# EAGLE board 20140912avoccado-avr-pcb-100x100panel (EAGLE 7.2.0), part 1 of 3
Avoccado-avr controller
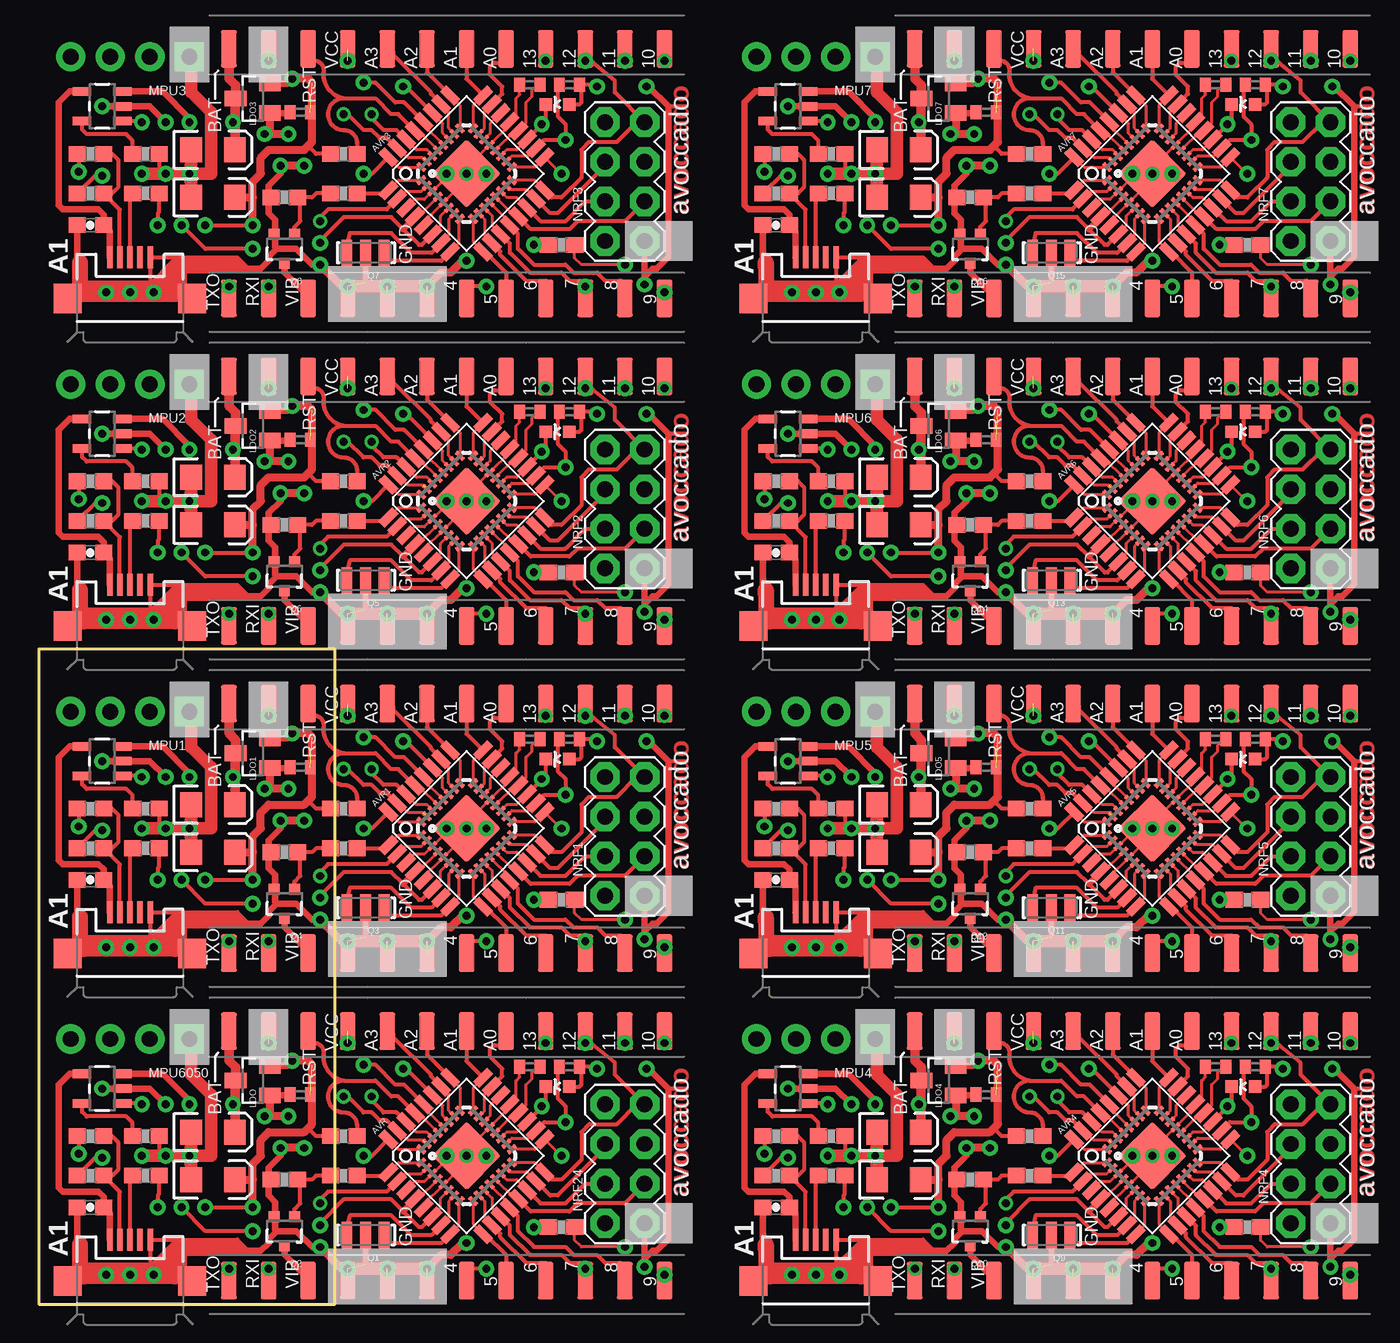
[diagram p0: board, top side]
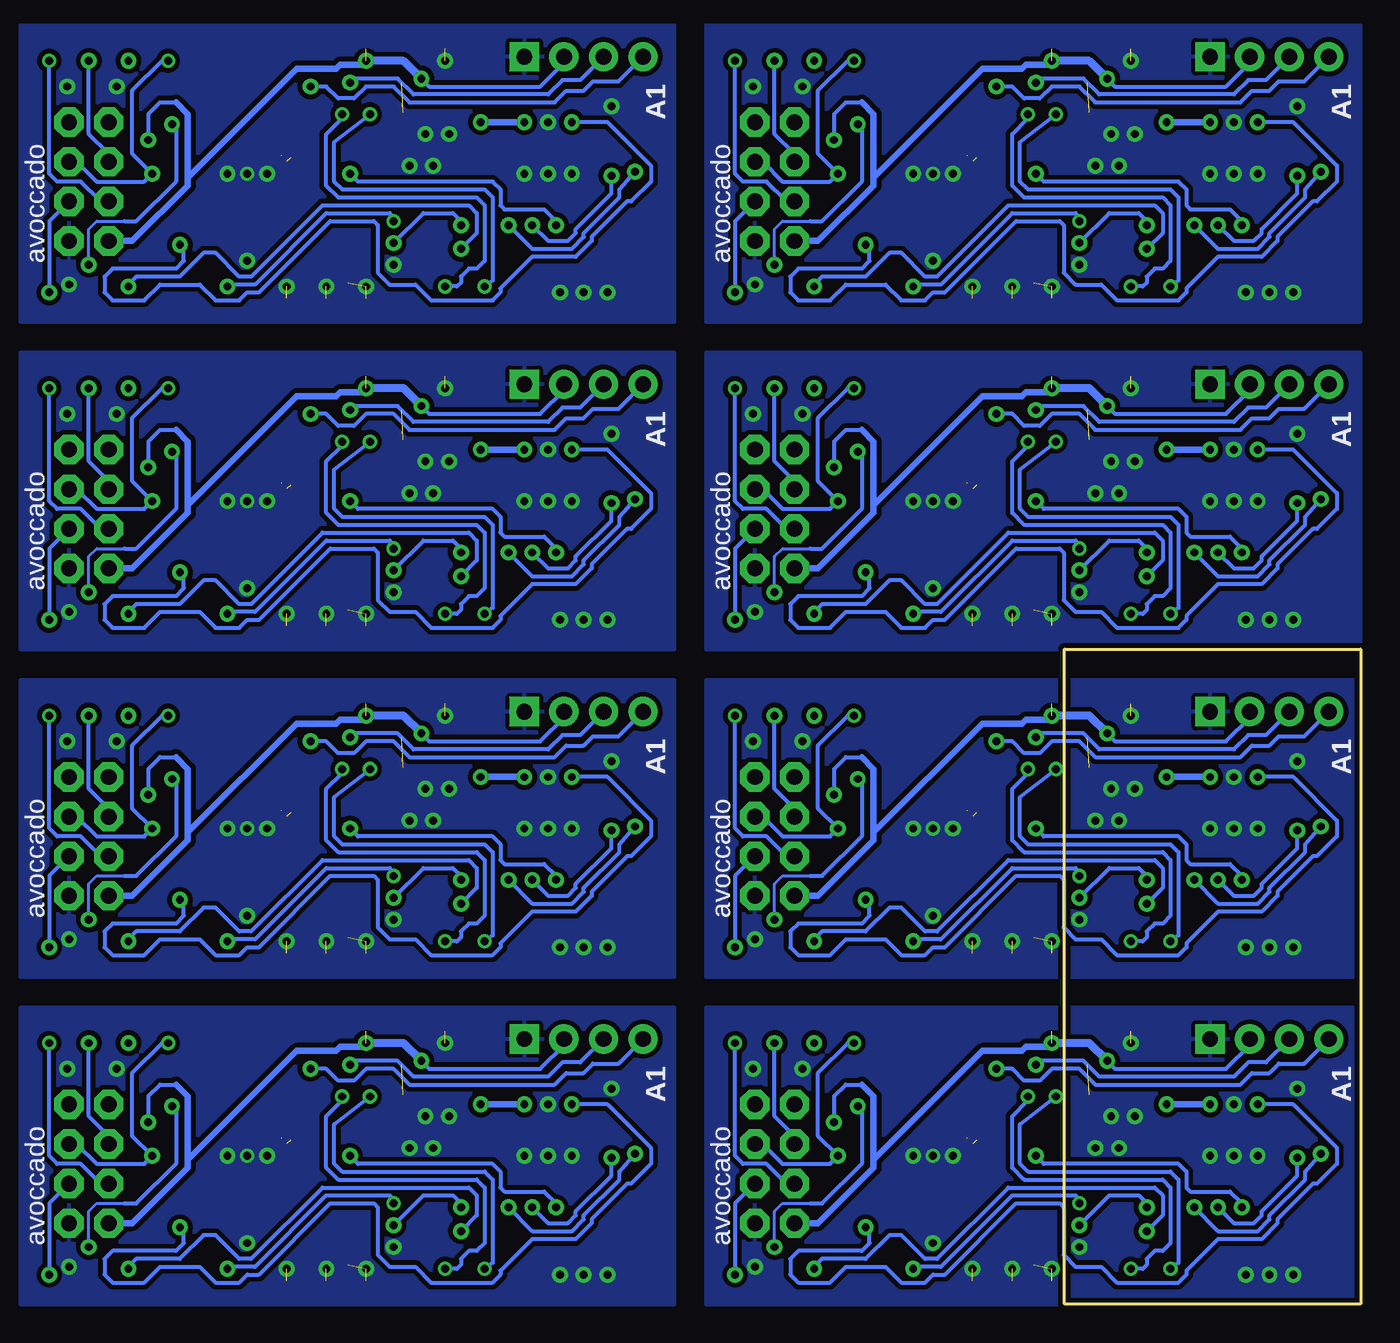
[diagram p1: board, bottom side, seen from below]

Size 19 x 42 mm. Coordinates in mm from the lower left corner, seen from the top.
Outline: 0,42 0,0 19,0 19,42 0,42
Copper layers (1*16): Top 0.035mm / dielectric 1.5mm / Bottom 0.035mm
Design rules "haka_35_l2": minimum track width 0.15mm, minimum drill 0.3mm, track to track 0.15mm, track to pad 0.15mm, pad to pad 0.15mm, via to via 0.15mm, smd to smd 0mil, copper to edge 0.2mm, drill to drill 0.2mm, minimum pad ring 0.2mm, minimum via ring 0.2mm, stop-mask expansion 0.1mm, vias tented up to drill 0mil, thermal gap 10mil
Net classes: 1 vcc: width 0.254 mm; 3 usbvcc: width 0.203 mm, drill 0.61 mm, clearance 0.152 mm

## Footprints (pad centres in the part's own frame; a part is rotated, then mirrored left to right if it is on the bottom)
TQFP32-08 = smd 1.27 x 0.559: 1 -4.293,2.8; 2 -4.293,2; 3 -4.293,1.2; 4 -4.293,0.4; 5 -4.293,-0.4; 6 -4.293,-1.2; 7 -4.293,-2; 8 -4.293,-2.8; 17 4.293,-2.8; 18 4.293,-2; 19 4.293,-1.2; 20 4.293,-0.4; 21 4.293,0.4; 22 4.293,1.2; 23 4.293,2; 24 4.293,2.8 | smd 0.559 x 1.27: 9 -2.8,-4.293; 10 -2,-4.293; 11 -1.2,-4.293; 12 -0.4,-4.293; 13 0.4,-4.293; 14 1.2,-4.293; 15 2,-4.293; 16 2.8,-4.293; 25 2.8,4.293; 26 2,4.293; 27 1.2,4.293; 28 0.4,4.293; 29 -0.4,4.293; 30 -1.2,4.293; 31 -2,4.293; 32 -2.8,4.293
C0402 = smd 0.7 x 0.9: 1 -0.65,0; 2 0.65,0
0603-CAP = smd 1.1 x 1: 1 -0.85,0; 2 0.85,0
EIA3216 = smd 1.4 x 1.6: A 1.4,0; C -1.4,0
LED-0603 = smd 0.8 x 0.8: A 0,-0.75; C 0,0.75
MLF32 = smd 0.7 x 0.3: 1 -2.35,1.75; 2 -2.35,1.25; 3 -2.35,0.75; 4 -2.35,0.25; 5 -2.35,-0.25; 6 -2.35,-0.75; 7 -2.35,-1.25; 8 -2.35,-1.75; 17 2.35,-1.75; 18 2.35,-1.25; 19 2.35,-0.75; 20 2.35,-0.25; 21 2.35,0.25; 22 2.35,0.75; 23 2.35,1.25; 24 2.35,1.75 | smd 0.3 x 0.7: 9 -1.75,-2.35; 10 -1.25,-2.35; 11 -0.75,-2.35; 12 -0.25,-2.35; 13 0.25,-2.35; 14 0.75,-2.35; 15 1.25,-2.35; 16 1.75,-2.35; 25 1.75,2.35; 26 1.25,2.35; 27 0.75,2.35; 28 0.25,2.35; 29 -0.25,2.35; 30 -0.75,2.35; 31 -1.25,2.35; 32 -1.75,2.35 | smd 3.1 x 3.1: PAD 0,0
1X04-SMD = smd 1 x 2.4: 1 -3.81,-0.254; 2 -1.27,-0.254; 3 1.27,-0.254; 4 3.81,-0.254
SOT23 = smd 1 x 1.4: 1 -0.95,-1.1; 2 0.95,-1.1; 3 0,1.1
1X04_NO_SILK = drill 1.016 pad 1.88 square: 1 0,0 | drill 1.016 pad 1.88: 2 2.54,0; 3 5.08,0; 4 7.62,0
2X4 = drill 1.016 pad 1.88 octagon: 1 -3.81,-1.27; 2 -3.81,1.27; 3 -1.27,-1.27; 4 -1.27,1.27; 5 1.27,-1.27; 6 1.27,1.27; 7 3.81,-1.27; 8 3.81,1.27
RESONATOR-SMD = smd 0.7 x 1.7: 1 -1.2,0; 2 0,0; 3 1.2,0
SOT323 = smd 0.7 x 0.7: 1 -0.65,-0.925; 2 0.65,-0.925; 3 0,0.925
0603-RES = smd 1.1 x 1: 1 -0.85,0; 2 0.85,0
SOT23-5 = smd 0.55 x 1.2: 1 -0.95,-1.3; 2 0,-1.3; 3 0.95,-1.3; 4 0.95,1.3; 5 -0.95,1.3
USB-MICROB = smd 0.35 x 1.4: D+ 0,2.65; D- -0.65,2.65; GND 1.3,2.65; ID 0.65,2.65; VBUS -1.3,2.65 | smd 1.8 x 1.9: MT1 -4,0; MT2 4,0

## Placement (x,y rotation side)
AVR  ATMEGA328P  [TQFP32-08]  27.43,9.5 45 top  (outside the outline)
AVR1  ATMEGA328P  [TQFP32-08]  27.43,30.5 45 top  (outside the outline)
AVR2  ATMEGA328P  [TQFP32-08]  27.43,51.5 45 top  (outside the outline)
AVR3  ATMEGA328P  [TQFP32-08]  27.43,72.5 45 top  (outside the outline)
AVR4  ATMEGA328P  [TQFP32-08]  71.43,9.5 45 top  (outside the outline)
AVR5  ATMEGA328P  [TQFP32-08]  71.43,30.5 45 top  (outside the outline)
AVR6  ATMEGA328P  [TQFP32-08]  71.43,51.5 45 top  (outside the outline)
AVR7  ATMEGA328P  [TQFP32-08]  71.43,72.5 45 top  (outside the outline)
C1  0.1uF  [C0402]  31.5,15.21 0 top  (outside the outline)
C2  0.1uF  [C0402]  16.76,34.44 180 top
C3  0.1uF  [C0402]  34.04,15.21 180 top  (outside the outline)
C4  4.7uF  [0603-CAP]  3.3,6.2 180 top
C5  10uF  [EIA3216]  11.18,28.98 0 top
C6  0.1uF  [C0402]  34.04,36.22 180 top  (outside the outline)
C7  0.1uF  [C0402]  31.5,36.22 0 top  (outside the outline)
C8  10uF  [EIA3216]  11.18,32.02 0 top
C9  4.7uF  [0603-CAP]  3.3,27.2 180 top
C10  0.1uF  [C0402]  16.76,13.44 180 top
C11  0.1uF  [C0402]  16.76,55.44 180 top  (outside the outline)
C12  10uF  [EIA3216]  11.18,49.98 0 top  (outside the outline)
C13  10uF  [EIA3216]  11.18,7.98 0 top
C14  0.1uF  [C0402]  34.04,57.22 180 top  (outside the outline)
C15  0.1uF  [C0402]  31.5,57.22 0 top  (outside the outline)
C16  10uF  [EIA3216]  11.18,53.02 0 top  (outside the outline)
C17  4.7uF  [0603-CAP]  3.3,48.2 180 top  (outside the outline)
C18  0.1uF  [C0402]  16.76,76.44 180 top  (outside the outline)
C19  10uF  [EIA3216]  11.18,11.02 0 top
C20  10uF  [EIA3216]  11.18,70.98 0 top  (outside the outline)
C21  0.1uF  [C0402]  34.04,78.22 180 top  (outside the outline)
C22  0.1uF  [C0402]  31.5,78.22 0 top  (outside the outline)
C23  10uF  [EIA3216]  11.18,74.02 0 top  (outside the outline)
C24  4.7uF  [0603-CAP]  3.3,69.2 180 top  (outside the outline)
C25  0.1uF  [C0402]  60.76,13.44 180 top  (outside the outline)
C26  10uF  [EIA3216]  55.18,7.98 0 top  (outside the outline)
C27  0.1uF  [C0402]  78.04,15.21 180 top  (outside the outline)
C28  0.1uF  [C0402]  75.5,15.21 0 top  (outside the outline)
C29  10uF  [EIA3216]  55.18,11.02 0 top  (outside the outline)
C30  4.7uF  [0603-CAP]  47.3,6.2 180 top  (outside the outline)
C31  0.1uF  [C0402]  60.76,34.44 180 top  (outside the outline)
C32  10uF  [EIA3216]  55.18,28.98 0 top  (outside the outline)
C33  0.1uF  [C0402]  78.04,36.22 180 top  (outside the outline)
C34  0.1uF  [C0402]  75.5,36.22 0 top  (outside the outline)
C35  10uF  [EIA3216]  55.18,32.02 0 top  (outside the outline)
C36  4.7uF  [0603-CAP]  47.3,27.2 180 top  (outside the outline)
C37  0.1uF  [C0402]  60.76,55.44 180 top  (outside the outline)
C38  10uF  [EIA3216]  55.18,49.98 0 top  (outside the outline)
C39  0.1uF  [C0402]  78.04,57.22 180 top  (outside the outline)
C40  0.1uF  [C0402]  75.5,57.22 0 top  (outside the outline)
C41  10uF  [EIA3216]  55.18,53.02 0 top  (outside the outline)
C42  4.7uF  [0603-CAP]  47.3,48.2 180 top  (outside the outline)
C43  0.1uF  [C0402]  60.76,76.44 180 top  (outside the outline)
C44  10uF  [EIA3216]  55.18,70.98 0 top  (outside the outline)
C45  0.1uF  [C0402]  78.04,78.22 180 top  (outside the outline)
C46  0.1uF  [C0402]  75.5,78.22 0 top  (outside the outline)
C47  10uF  [EIA3216]  55.18,74.02 0 top  (outside the outline)
C48  4.7uF  [0603-CAP]  47.3,69.2 180 top  (outside the outline)
D1  LED  [LED-0603]  33.27,13.95 90 top  (outside the outline)
D2  LED  [LED-0603]  33.27,34.95 90 top  (outside the outline)
D3  LED  [LED-0603]  33.27,55.95 90 top  (outside the outline)
D4  LED  [LED-0603]  33.27,76.94 90 top  (outside the outline)
D5  LED  [LED-0603]  77.27,13.95 90 top  (outside the outline)
D6  LED  [LED-0603]  77.27,34.95 90 top  (outside the outline)
D7  LED  [LED-0603]  77.27,55.95 90 top  (outside the outline)
D8  LED  [LED-0603]  77.27,76.94 90 top  (outside the outline)
IC1  ATMEGA328P-20MU  [MLF32]  27.43,30.5 45 top  (outside the outline)
IC2  ATMEGA328P-20MU  [MLF32]  27.43,51.5 45 top  (outside the outline)
IC3  ATMEGA328P-20MU  [MLF32]  27.43,72.5 45 top  (outside the outline)
IC4  ATMEGA328P-20MU  [MLF32]  71.43,9.5 45 top  (outside the outline)
IC5  ATMEGA328P-20MU  [MLF32]  27.43,9.5 45 top  (outside the outline)
IC6  ATMEGA328P-20MU  [MLF32]  71.43,30.5 45 top  (outside the outline)
IC7  ATMEGA328P-20MU  [MLF32]  71.43,51.5 45 top  (outside the outline)
IC8  ATMEGA328P-20MU  [MLF32]  71.43,72.5 45 top  (outside the outline)
JP1  [1X04-SMD]  16,38.76 0 top
JP2  [1X04-SMD]  26.16,38.76 0 top  (outside the outline)
JP3  [1X04-SMD]  16,17.75 0 top
JP4  [1X04-SMD]  36.32,38.76 0 top  (outside the outline)
JP5  [1X04-SMD]  26.16,17.75 0 top  (outside the outline)
JP6  [1X04-SMD]  36.32,22.25 180 top  (outside the outline)
JP7  [1X04-SMD]  26.16,22.25 180 top  (outside the outline)
JP8  [1X04-SMD]  36.32,17.75 0 top  (outside the outline)
JP9  [1X04-SMD]  36.32,1.25 180 top  (outside the outline)
JP10  [1X04-SMD]  26.16,1.25 180 top  (outside the outline)
JP11  [1X04-SMD]  16,1.25 180 top
JP12  [1X04-SMD]  16,22.25 180 top
JP13  [1X04-SMD]  16,59.76 0 top  (outside the outline)
JP14  [1X04-SMD]  26.16,59.76 0 top  (outside the outline)
JP15  [1X04-SMD]  36.32,59.76 0 top  (outside the outline)
JP16  [1X04-SMD]  36.32,43.24 180 top  (outside the outline)
JP17  [1X04-SMD]  26.16,43.24 180 top  (outside the outline)
JP18  [1X04-SMD]  16,43.24 180 top
JP19  [1X04-SMD]  16,80.75 0 top  (outside the outline)
JP20  [1X04-SMD]  26.16,80.75 0 top  (outside the outline)
JP21  [1X04-SMD]  36.32,80.75 0 top  (outside the outline)
JP22  [1X04-SMD]  36.32,64.25 180 top  (outside the outline)
JP23  [1X04-SMD]  26.16,64.25 180 top  (outside the outline)
JP24  [1X04-SMD]  16,64.25 180 top  (outside the outline)
JP25  [1X04-SMD]  60,17.75 0 top  (outside the outline)
JP26  [1X04-SMD]  70.16,17.75 0 top  (outside the outline)
JP27  [1X04-SMD]  80.32,17.75 0 top  (outside the outline)
JP28  [1X04-SMD]  80.32,1.25 180 top  (outside the outline)
JP29  [1X04-SMD]  70.16,1.25 180 top  (outside the outline)
JP30  [1X04-SMD]  60,1.25 180 top  (outside the outline)
JP31  [1X04-SMD]  60,38.76 0 top  (outside the outline)
JP32  [1X04-SMD]  70.16,38.76 0 top  (outside the outline)
JP33  [1X04-SMD]  80.32,38.76 0 top  (outside the outline)
JP34  [1X04-SMD]  80.32,22.25 180 top  (outside the outline)
JP35  [1X04-SMD]  70.16,22.25 180 top  (outside the outline)
JP36  [1X04-SMD]  60,22.25 180 top  (outside the outline)
JP37  [1X04-SMD]  60,59.76 0 top  (outside the outline)
JP38  [1X04-SMD]  70.16,59.76 0 top  (outside the outline)
JP39  [1X04-SMD]  80.32,59.76 0 top  (outside the outline)
JP40  [1X04-SMD]  80.32,43.24 180 top  (outside the outline)
JP41  [1X04-SMD]  70.16,43.24 180 top  (outside the outline)
JP42  [1X04-SMD]  60,43.24 180 top  (outside the outline)
JP43  [1X04-SMD]  60,80.75 0 top  (outside the outline)
JP44  [1X04-SMD]  70.16,80.75 0 top  (outside the outline)
JP45  [1X04-SMD]  80.32,80.75 0 top  (outside the outline)
JP46  [1X04-SMD]  80.32,64.25 180 top  (outside the outline)
JP47  [1X04-SMD]  70.16,64.25 180 top  (outside the outline)
JP48  [1X04-SMD]  60,64.25 180 top  (outside the outline)
LDO  MCP1703CB  [SOT23]  13.72,14.33 90 top
LDO1  MCP1703CB  [SOT23]  13.72,35.33 90 top
LDO2  MCP1703CB  [SOT23]  13.72,56.33 90 top  (outside the outline)
LDO3  MCP1703CB  [SOT23]  13.72,77.33 90 top  (outside the outline)
LDO4  MCP1703CB  [SOT23]  57.72,14.33 90 top  (outside the outline)
LDO5  MCP1703CB  [SOT23]  57.72,35.33 90 top  (outside the outline)
LDO6  MCP1703CB  [SOT23]  57.72,56.33 90 top  (outside the outline)
LDO7  MCP1703CB  [SOT23]  57.72,77.33 90 top  (outside the outline)
MPU1  [1X04_NO_SILK]  9.65,37.99 180 top
MPU2  [1X04_NO_SILK]  9.65,58.99 180 top  (outside the outline)
MPU3  [1X04_NO_SILK]  9.65,79.99 180 top  (outside the outline)
MPU4  [1X04_NO_SILK]  53.65,16.99 180 top  (outside the outline)
MPU5  [1X04_NO_SILK]  53.65,37.99 180 top  (outside the outline)
MPU6  [1X04_NO_SILK]  53.65,58.99 180 top  (outside the outline)
MPU7  [1X04_NO_SILK]  53.65,79.99 180 top  (outside the outline)
MPU6050  [1X04_NO_SILK]  9.65,16.99 180 top
NRF1  M04X2  [2X4]  37.59,29.99 90 top  (outside the outline)
NRF2  M04X2  [2X4]  37.59,50.99 90 top  (outside the outline)
NRF3  M04X2  [2X4]  37.59,71.99 90 top  (outside the outline)
NRF4  M04X2  [2X4]  81.59,8.99 90 top  (outside the outline)
NRF5  M04X2  [2X4]  81.59,29.99 90 top  (outside the outline)
NRF6  M04X2  [2X4]  81.59,50.99 90 top  (outside the outline)
NRF7  M04X2  [2X4]  81.59,71.99 90 top  (outside the outline)
NRF24  M04X2  [2X4]  37.59,8.99 90 top  (outside the outline)
Q1  16MHz  [RESONATOR-SMD]  20.95,4.42 180 top
Q2  FET  [SOT323]  15.75,4.67 180 top
Q3  16MHz  [RESONATOR-SMD]  20.95,25.42 180 top
Q4  FET  [SOT323]  15.75,25.67 180 top
Q5  16MHz  [RESONATOR-SMD]  20.95,46.42 180 top  (outside the outline)
Q6  FET  [SOT323]  15.75,46.67 180 top  (outside the outline)
Q7  16MHz  [RESONATOR-SMD]  20.95,67.42 180 top  (outside the outline)
Q8  FET  [SOT323]  15.75,67.67 180 top  (outside the outline)
Q9  16MHz  [RESONATOR-SMD]  64.95,4.42 180 top  (outside the outline)
Q10  FET  [SOT323]  59.75,4.67 180 top  (outside the outline)
Q11  16MHz  [RESONATOR-SMD]  64.95,25.42 180 top  (outside the outline)
Q12  FET  [SOT323]  59.75,25.67 180 top  (outside the outline)
Q13  16MHz  [RESONATOR-SMD]  64.95,46.42 180 top  (outside the outline)
Q14  FET  [SOT323]  59.75,46.67 180 top  (outside the outline)
Q15  16MHz  [RESONATOR-SMD]  64.95,67.42 180 top  (outside the outline)
Q16  FET  [SOT323]  59.75,67.67 180 top  (outside the outline)
R1  1K  [0603-RES]  19.56,8.23 180 top
R2  10K  [0603-RES]  19.56,10.77 180 top
R3  2K  [0603-RES]  6.86,10.77 180 top
R4  2K  [0603-RES]  33.53,4.93 180 top  (outside the outline)
R5  1M  [0603-RES]  15.75,7.98 0 top
R6  68  [0603-RES]  3.3,8.23 180 top
R7  68  [0603-RES]  6.86,8.23 0 top
R8  2K  [0603-RES]  3.3,10.77 180 top
R9  10K  [0603-RES]  19.56,31.77 180 top
R10  1K  [0603-RES]  19.56,29.23 180 top
R11  2K  [0603-RES]  6.86,31.77 180 top
R12  2K  [0603-RES]  33.53,25.93 180 top  (outside the outline)
R13  1M  [0603-RES]  15.75,28.98 0 top
R14  68  [0603-RES]  3.3,29.23 180 top
R15  68  [0603-RES]  6.86,29.23 0 top
R16  2K  [0603-RES]  3.3,31.77 180 top
R17  10K  [0603-RES]  19.56,52.77 180 top  (outside the outline)
R18  1K  [0603-RES]  19.56,50.23 180 top  (outside the outline)
R19  2K  [0603-RES]  6.86,52.77 180 top  (outside the outline)
R20  2K  [0603-RES]  33.53,46.93 180 top  (outside the outline)
R21  1M  [0603-RES]  15.75,49.98 0 top  (outside the outline)
R22  68  [0603-RES]  3.3,50.23 180 top  (outside the outline)
R23  68  [0603-RES]  6.86,50.23 0 top  (outside the outline)
R24  2K  [0603-RES]  3.3,52.77 180 top  (outside the outline)
R25  10K  [0603-RES]  19.56,73.77 180 top  (outside the outline)
R26  1K  [0603-RES]  19.56,71.23 180 top  (outside the outline)
R27  2K  [0603-RES]  6.86,73.77 180 top  (outside the outline)
R28  2K  [0603-RES]  33.53,67.93 180 top  (outside the outline)
R29  1M  [0603-RES]  15.75,70.98 0 top  (outside the outline)
R30  68  [0603-RES]  3.3,71.23 180 top  (outside the outline)
R31  68  [0603-RES]  6.86,71.23 0 top  (outside the outline)
R32  2K  [0603-RES]  3.3,73.77 180 top  (outside the outline)
R33  10K  [0603-RES]  63.56,10.77 180 top  (outside the outline)
R34  1K  [0603-RES]  63.56,8.23 180 top  (outside the outline)
R35  2K  [0603-RES]  50.86,10.77 180 top  (outside the outline)
R36  2K  [0603-RES]  77.53,4.93 180 top  (outside the outline)
R37  1M  [0603-RES]  59.75,7.98 0 top  (outside the outline)
R38  68  [0603-RES]  47.3,8.23 180 top  (outside the outline)
R39  68  [0603-RES]  50.86,8.23 0 top  (outside the outline)
R40  2K  [0603-RES]  47.3,10.77 180 top  (outside the outline)
R41  10K  [0603-RES]  63.56,31.77 180 top  (outside the outline)
R42  1K  [0603-RES]  63.56,29.23 180 top  (outside the outline)
R43  2K  [0603-RES]  50.86,31.77 180 top  (outside the outline)
R44  2K  [0603-RES]  77.53,25.93 180 top  (outside the outline)
R45  1M  [0603-RES]  59.75,28.98 0 top  (outside the outline)
R46  68  [0603-RES]  47.3,29.23 180 top  (outside the outline)
R47  68  [0603-RES]  50.86,29.23 0 top  (outside the outline)
R48  2K  [0603-RES]  47.3,31.77 180 top  (outside the outline)
R49  10K  [0603-RES]  63.56,52.77 180 top  (outside the outline)
R50  1K  [0603-RES]  63.56,50.23 180 top  (outside the outline)
R51  2K  [0603-RES]  50.86,52.77 180 top  (outside the outline)
R52  2K  [0603-RES]  77.53,46.93 180 top  (outside the outline)
R53  1M  [0603-RES]  59.75,49.98 0 top  (outside the outline)
R54  68  [0603-RES]  47.3,50.23 180 top  (outside the outline)
R55  68  [0603-RES]  50.86,50.23 0 top  (outside the outline)
R56  2K  [0603-RES]  47.3,52.77 180 top  (outside the outline)
R57  10K  [0603-RES]  63.56,73.77 180 top  (outside the outline)
R58  1K  [0603-RES]  63.56,71.23 180 top  (outside the outline)
R59  2K  [0603-RES]  50.86,73.77 180 top  (outside the outline)
R60  2K  [0603-RES]  77.53,67.93 180 top  (outside the outline)
R61  1M  [0603-RES]  59.75,70.98 0 top  (outside the outline)
R62  68  [0603-RES]  47.3,71.23 180 top  (outside the outline)
R63  68  [0603-RES]  50.86,71.23 0 top  (outside the outline)
R64  2K  [0603-RES]  47.3,73.77 180 top  (outside the outline)
U1  MCP73831  [SOT23-5]  4.06,34.82 90 top
U2  MCP73831  [SOT23-5]  4.06,13.82 90 top
U3  MCP73831  [SOT23-5]  4.06,55.82 90 top  (outside the outline)
U4  MCP73831  [SOT23-5]  4.06,76.82 90 top  (outside the outline)
U5  MCP73831  [SOT23-5]  48.06,13.82 90 top  (outside the outline)
U6  MCP73831  [SOT23-5]  48.06,34.82 90 top  (outside the outline)
U7  MCP73831  [SOT23-5]  48.06,55.82 90 top  (outside the outline)
U8  MCP73831  [SOT23-5]  48.06,76.82 90 top  (outside the outline)
X1  Micro USB  [USB-MICROB]  5.84,1.48 0 top
X2  Micro USB  [USB-MICROB]  5.84,22.48 0 top
X3  Micro USB  [USB-MICROB]  5.84,43.48 0 top
X4  Micro USB  [USB-MICROB]  5.84,64.48 0 top  (outside the outline)
X5  Micro USB  [USB-MICROB]  49.84,1.48 0 top  (outside the outline)
X6  Micro USB  [USB-MICROB]  49.84,22.48 0 top  (outside the outline)
X7  Micro USB  [USB-MICROB]  49.84,43.48 0 top  (outside the outline)
X8  Micro USB  [USB-MICROB]  49.84,64.48 0 top  (outside the outline)

## Library data of the parts
AVR AVR1-AVR7 = SparkFun-DigitalIC; PROD_ID: IC-09069
C1-C3 C5-C8 C10-C16 C18-C23 C25-C29 C31-C35 C37-C41 C43-C47 D1-D8 Q1 Q3 Q5 Q7 Q9 Q11 Q13 Q15 U1-U8 X1-X8 = SparkFun
C4 C9 C17 C24 C30 C36 C42 C48 = SparkFun-Capacitors; PROD_ID: CAP-08280
IC1-IC8 = idii
JP1-JP48 = smd-pads
LDO LDO1-LDO7 = linear
MPU1-MPU7 MPU6050 NRF1-NRF7 NRF24 = SparkFun-Connectors
Q2 Q4 Q6 Q8 Q10 Q12 Q14 Q16 = SparkFun-DiscreteSemi; PROD_ID: TRANS-11151
R1-R64 = SparkFun-Resistors

## Nets
3V1: AVR1.4 AVR1.6 AVR1.18 C2.1 C5.A C6.2 IC1.4 IC1.6 IC1.18 JP1.4 LDO1.2 MPU1.2 NRF1.2 R9.2 R16.2
3V2: AVR2.4 AVR2.6 AVR2.18 C11.1 C12.A C14.2 IC2.4 IC2.6 IC2.18 JP13.4 LDO2.2 MPU2.2 NRF2.2 R17.2 R24.2
3V3: AVR.4 AVR.6 AVR.18 C3.2 C10.1 C13.A IC5.4 IC5.6 IC5.18 JP3.4 LDO.2 MPU6050.2 NRF24.2 R2.2 R8.2
3V4: AVR3.4 AVR3.6 AVR3.18 C18.1 C20.A C21.2 IC3.4 IC3.6 IC3.18 JP19.4 LDO3.2 MPU3.2 NRF3.2 R25.2 R32.2
3V5: AVR4.4 AVR4.6 AVR4.18 C25.1 C26.A C27.2 IC4.4 IC4.6 IC4.18 JP25.4 LDO4.2 MPU4.2 NRF4.2 R33.2 R40.2
3V6: AVR5.4 AVR5.6 AVR5.18 C31.1 C32.A C33.2 IC6.4 IC6.6 IC6.18 JP31.4 LDO5.2 MPU5.2 NRF5.2 R41.2 R48.2
3V7: AVR6.4 AVR6.6 AVR6.18 C37.1 C38.A C39.2 IC7.4 IC7.6 IC7.18 JP37.4 LDO6.2 MPU6.2 NRF6.2 R49.2 R56.2
3V8: AVR7.4 AVR7.6 AVR7.18 C43.1 C44.A C45.2 IC8.4 IC8.6 IC8.18 JP43.4 LDO7.2 MPU7.2 NRF7.2 R57.2 R64.2
A0: AVR.23 IC5.23 JP5.4
A1: AVR.24 IC5.24 JP5.3
A2: AVR.25 IC5.25 JP5.2
A3: AVR.26 IC5.26 JP5.1
A4: AVR.27 IC5.27 MPU6050.4
A5: AVR.28 IC5.28 MPU6050.3
A6: AVR.19 D1.C IC5.19 R4.1
A7: AVR.22 IC5.22
A8: AVR1.28 IC1.28 MPU1.3
A9: AVR1.27 IC1.27 MPU1.4
A10: AVR1.26 IC1.26 JP2.1
A11: AVR1.25 IC1.25 JP2.2
A12: AVR1.24 IC1.24 JP2.3
A13: AVR1.23 IC1.23 JP2.4
A14: AVR1.19 D2.C IC1.19 R12.1
A15: AVR1.22 IC1.22
A16: AVR2.28 IC2.28 MPU2.3
A17: AVR2.27 IC2.27 MPU2.4
A18: AVR2.26 IC2.26 JP14.1
A19: AVR2.25 IC2.25 JP14.2
A20: AVR2.24 IC2.24 JP14.3
A21: AVR2.23 IC2.23 JP14.4
A22: AVR2.19 D3.C IC2.19 R20.1
A23: AVR2.22 IC2.22
A24: AVR3.28 IC3.28 MPU3.3
A25: AVR3.27 IC3.27 MPU3.4
A26: AVR3.26 IC3.26 JP20.1
A27: AVR3.25 IC3.25 JP20.2
A28: AVR3.24 IC3.24 JP20.3
A29: AVR3.23 IC3.23 JP20.4
A30: AVR3.19 D4.C IC3.19 R28.1
A31: AVR3.22 IC3.22
A32: AVR4.28 IC4.28 MPU4.3
A33: AVR4.27 IC4.27 MPU4.4
A34: AVR4.26 IC4.26 JP26.1
A35: AVR4.25 IC4.25 JP26.2
A36: AVR4.24 IC4.24 JP26.3
A37: AVR4.23 IC4.23 JP26.4
A38: AVR4.19 D5.C IC4.19 R36.1
A39: AVR4.22 IC4.22
A40: AVR5.28 IC6.28 MPU5.3
A41: AVR5.27 IC6.27 MPU5.4
A42: AVR5.26 IC6.26 JP32.1
A43: AVR5.25 IC6.25 JP32.2
A44: AVR5.24 IC6.24 JP32.3
A45: AVR5.23 IC6.23 JP32.4
A46: AVR5.19 D6.C IC6.19 R44.1
A47: AVR5.22 IC6.22
A48: AVR6.28 IC7.28 MPU6.3
A49: AVR6.27 IC7.27 MPU6.4
A50: AVR6.26 IC7.26 JP38.1
A51: AVR6.25 IC7.25 JP38.2
A52: AVR6.24 IC7.24 JP38.3
A53: AVR6.23 IC7.23 JP38.4
A54: AVR6.19 D7.C IC7.19 R52.1
A55: AVR6.22 IC7.22
A56: AVR7.28 IC8.28 MPU7.3
A57: AVR7.27 IC8.27 MPU7.4
A58: AVR7.26 IC8.26 JP44.1
A59: AVR7.25 IC8.25 JP44.2
A60: AVR7.24 IC8.24 JP44.3
A61: AVR7.23 IC8.23 JP44.4
A62: AVR7.19 D8.C IC8.19 R60.1
A63: AVR7.22 IC8.22
AREF: AVR.20 C1.2 IC5.20
AREF1: AVR1.20 C7.2 IC1.20
AREF2: AVR2.20 C15.2 IC2.20
AREF3: AVR3.20 C22.2 IC3.20
AREF4: AVR4.20 C28.2 IC4.20
AREF5: AVR5.20 C34.2 IC6.20
AREF6: AVR6.20 C40.2 IC7.20
AREF7: AVR7.20 C46.2 IC8.20
BUS: C4.1 U2.4 X1.VBUS
BUS1: C9.1 U1.4 X2.VBUS
BUS2: C17.1 U3.4 X3.VBUS
BUS3: C24.1 U4.4 X4.VBUS
BUS4: C30.1 U5.4 X5.VBUS
BUS5: C36.1 U6.4 X6.VBUS
BUS6: C42.1 U7.4 X7.VBUS
BUS7: C48.1 U8.4 X8.VBUS
D1: AVR1.13 IC1.13 JP6.1 NRF1.3
D2: AVR.32 IC5.32 R7.2
D3: AVR.1 IC5.1 R1.1
D4: AVR.2 IC5.2 JP10.2
D5: AVR.9 IC5.9 JP10.1
D6: AVR.10 IC5.10 JP9.4
D7: AVR.11 IC5.11 JP9.3 R6.2
D8: AVR.12 IC5.12 JP9.2
D9: AVR.13 IC5.13 JP9.1 NRF24.3
D10: AVR.14 IC5.14 JP8.4 NRF24.4
D11: AVR1.12 IC1.12 JP6.2
D12: AVR1.32 IC1.32 R15.2
D13: AVR1.1 IC1.1 R10.1
D14: AVR1.2 IC1.2 JP7.2
D15: AVR1.9 IC1.9 JP7.1
D16: AVR1.10 IC1.10 JP6.4
D17: AVR1.11 IC1.11 JP6.3 R14.2
D18: AVR1.14 IC1.14 JP4.4 NRF1.4
D19: AVR2.13 IC2.13 JP16.1 NRF2.3
D20: AVR2.12 IC2.12 JP16.2
D21: AVR2.32 IC2.32 R23.2
D22: AVR2.1 IC2.1 R18.1
D23: AVR2.2 IC2.2 JP17.2
D24: AVR2.9 IC2.9 JP17.1
D25: AVR2.10 IC2.10 JP16.4
D26: AVR2.11 IC2.11 JP16.3 R22.2
D27: AVR2.14 IC2.14 JP15.4 NRF2.4
D28: AVR3.13 IC3.13 JP22.1 NRF3.3
D29: AVR3.12 IC3.12 JP22.2
D30: AVR3.32 IC3.32 R31.2
D31: AVR3.1 IC3.1 R26.1
D32: AVR3.2 IC3.2 JP23.2
D33: AVR3.9 IC3.9 JP23.1
D34: AVR3.10 IC3.10 JP22.4
D35: AVR3.11 IC3.11 JP22.3 R30.2
D36: AVR3.14 IC3.14 JP21.4 NRF3.4
D37: AVR4.13 IC4.13 JP28.1 NRF4.3
D38: AVR4.12 IC4.12 JP28.2
D39: AVR4.32 IC4.32 R39.2
D40: AVR4.1 IC4.1 R34.1
D41: AVR4.2 IC4.2 JP29.2
D42: AVR4.9 IC4.9 JP29.1
D43: AVR4.10 IC4.10 JP28.4
D44: AVR4.11 IC4.11 JP28.3 R38.2
D45: AVR4.14 IC4.14 JP27.4 NRF4.4
D46: AVR5.13 IC6.13 JP34.1 NRF5.3
D47: AVR5.12 IC6.12 JP34.2
D48: AVR5.32 IC6.32 R47.2
D49: AVR5.1 IC6.1 R42.1
D50: AVR5.2 IC6.2 JP35.2
D51: AVR5.9 IC6.9 JP35.1
D52: AVR5.10 IC6.10 JP34.4
D53: AVR5.11 IC6.11 JP34.3 R46.2
D54: AVR5.14 IC6.14 JP33.4 NRF5.4
D55: AVR6.13 IC7.13 JP40.1 NRF6.3
D56: AVR6.12 IC7.12 JP40.2
D57: AVR6.32 IC7.32 R55.2
D58: AVR6.1 IC7.1 R50.1
D59: AVR6.2 IC7.2 JP41.2
D60: AVR6.9 IC7.9 JP41.1
D61: AVR6.10 IC7.10 JP40.4
D62: AVR6.11 IC7.11 JP40.3 R54.2
D63: AVR6.14 IC7.14 JP39.4 NRF6.4
D64: AVR7.13 IC8.13 JP46.1 NRF7.3
D65: AVR7.12 IC8.12 JP46.2
D66: AVR7.32 IC8.32 R63.2
D67: AVR7.1 IC8.1 R58.1
D68: AVR7.2 IC8.2 JP47.2
D69: AVR7.9 IC8.9 JP47.1
D70: AVR7.10 IC8.10 JP46.4
D71: AVR7.11 IC8.11 JP46.3 R62.2
D72: AVR7.14 IC8.14 JP45.4 NRF7.4
GND [vcc]: AVR.3 AVR.5 AVR.21 C1.1 C3.1 C4.2 C10.2 C13.C C19.C D1.A IC5.3 IC5.5 IC5.21 JP3.2 JP10.3 JP10.4 JP11.1 LDO.1 MPU6050.1 NRF24.1 Q1.2 Q2.2 R3.1 R5.1 U2.2 X1.GND
GND1 [vcc]: AVR1.3 AVR1.5 AVR1.21 C2.2 C5.C C6.1 C7.1 C8.C C9.2 D2.A IC1.3 IC1.5 IC1.21 JP1.2 JP7.3 JP7.4 JP12.1 LDO1.1 MPU1.1 NRF1.1 Q3.2 Q4.2 R11.1 R13.1 U1.2 X2.GND
GND2 [vcc]: AVR2.3 AVR2.5 AVR2.21 C11.2 C12.C C14.1 C15.1 C16.C C17.2 D3.A IC2.3 IC2.5 IC2.21 JP13.2 JP17.3 JP17.4 JP18.1 LDO2.1 MPU2.1 NRF2.1 Q5.2 Q6.2 R19.1 R21.1 U3.2 X3.GND
GND3 [vcc]: AVR3.3 AVR3.5 AVR3.21 C18.2 C20.C C21.1 C22.1 C23.C C24.2 D4.A IC3.3 IC3.5 IC3.21 JP19.2 JP23.3 JP23.4 JP24.1 LDO3.1 MPU3.1 NRF3.1 Q7.2 Q8.2 R27.1 R29.1 U4.2 X4.GND
GND4 [vcc]: AVR4.3 AVR4.5 AVR4.21 C25.2 C26.C C27.1 C28.1 C29.C C30.2 D5.A IC4.3 IC4.5 IC4.21 JP25.2 JP29.3 JP29.4 JP30.1 LDO4.1 MPU4.1 NRF4.1 Q9.2 Q10.2 R35.1 R37.1 U5.2 X5.GND
GND5 [vcc]: AVR5.3 AVR5.5 AVR5.21 C31.2 C32.C C33.1 C34.1 C35.C C36.2 D6.A IC6.3 IC6.5 IC6.21 JP31.2 JP35.3 JP35.4 JP36.1 LDO5.1 MPU5.1 NRF5.1 Q11.2 Q12.2 R43.1 R45.1 U6.2 X6.GND
GND6 [vcc]: AVR6.3 AVR6.5 AVR6.21 C37.2 C38.C C39.1 C40.1 C41.C C42.2 D7.A IC7.3 IC7.5 IC7.21 JP37.2 JP41.3 JP41.4 JP42.1 LDO6.1 MPU6.1 NRF6.1 Q13.2 Q14.2 R51.1 R53.1 U7.2 X7.GND
GND7 [vcc]: AVR7.3 AVR7.5 AVR7.21 C43.2 C44.C C45.1 C46.1 C47.C C48.2 D8.A IC8.3 IC8.5 IC8.21 JP43.2 JP47.3 JP47.4 JP48.1 LDO7.1 MPU7.1 NRF7.1 Q15.2 Q16.2 R59.1 R61.1 U8.2 X8.GND
MISO: AVR.16 IC5.16 JP8.2 NRF24.7
MISO1: AVR1.16 IC1.16 JP4.2 NRF1.7
MISO2: AVR2.16 IC2.16 JP15.2 NRF2.7
MISO3: AVR3.16 IC3.16 JP21.2 NRF3.7
MISO4: AVR4.16 IC4.16 JP27.2 NRF4.7
MISO5: AVR5.16 IC6.16 JP33.2 NRF5.7
MISO6: AVR6.16 IC7.16 JP39.2 NRF6.7
MISO7: AVR7.16 IC8.16 JP45.2 NRF7.7
MOSI: AVR.15 IC5.15 JP8.3 NRF24.6
MOSI1: AVR1.15 IC1.15 JP4.3 NRF1.6
MOSI2: AVR2.15 IC2.15 JP15.3 NRF2.6
MOSI3: AVR3.15 IC3.15 JP21.3 NRF3.6
MOSI4: AVR4.15 IC4.15 JP27.3 NRF4.6
MOSI5: AVR5.15 IC6.15 JP33.3 NRF5.6
MOSI6: AVR6.15 IC7.15 JP39.3 NRF6.6
MOSI7: AVR7.15 IC8.15 JP45.3 NRF7.6
N$1: AVR.8 IC5.8 Q1.1
N$2: AVR.7 IC5.7 Q1.3
N$3: R3.2 U2.5
N$4: R4.2 U2.1
N$5: AVR1.8 IC1.8 Q3.1
N$6: Q2.1 R1.2 R5.2
N$7: AVR1.7 IC1.7 Q3.3
N$8: R11.2 U1.5
N$9: R12.2 U1.1
N$10: Q4.1 R10.2 R13.2
N$11: AVR2.8 IC2.8 Q5.1
N$12: AVR2.7 IC2.7 Q5.3
N$13: R19.2 U3.5
N$14: R20.2 U3.1
N$15: Q6.1 R18.2 R21.2
N$16: AVR3.8 IC3.8 Q7.1
N$17: AVR3.7 IC3.7 Q7.3
N$18: R27.2 U4.5
N$19: R28.2 U4.1
N$20: Q8.1 R26.2 R29.2
N$21: AVR4.8 IC4.8 Q9.1
N$22: AVR4.7 IC4.7 Q9.3
N$23: R35.2 U5.5
N$24: R36.2 U5.1
N$25: Q10.1 R34.2 R37.2
N$26: AVR5.8 IC6.8 Q11.1
N$27: AVR5.7 IC6.7 Q11.3
N$28: R43.2 U6.5
N$29: R44.2 U6.1
N$30: Q12.1 R42.2 R45.2
N$31: AVR6.8 IC7.8 Q13.1
N$32: AVR6.7 IC7.7 Q13.3
N$33: R51.2 U7.5
N$34: R52.2 U7.1
N$35: Q14.1 R50.2 R53.2
N$36: AVR7.8 IC8.8 Q15.1
N$37: AVR7.7 IC8.7 Q15.3
N$38: R59.2 U8.5
N$39: R60.2 U8.1
N$40: Q16.1 R58.2 R61.2
RESET: AVR.29 IC5.29 JP3.3 R2.1
RESET1: AVR1.29 IC1.29 JP1.3 R9.1
RESET2: AVR2.29 IC2.29 JP13.3 R17.1
RESET3: AVR3.29 IC3.29 JP19.3 R25.1
RESET4: AVR4.29 IC4.29 JP25.3 R33.1
RESET5: AVR5.29 IC6.29 JP31.3 R41.1
RESET6: AVR6.29 IC7.29 JP37.3 R49.1
RESET7: AVR7.29 IC8.29 JP43.3 R57.1
RXI: AVR.30 IC5.30 JP11.3
RXI1: AVR1.30 IC1.30 JP12.3
RXI2: AVR2.30 IC2.30 JP18.3
RXI3: AVR3.30 IC3.30 JP24.3
RXI4: AVR4.30 IC4.30 JP30.3
RXI5: AVR5.30 IC6.30 JP36.3
RXI6: AVR6.30 IC7.30 JP42.3
RXI7: AVR7.30 IC8.30 JP48.3
SCK: AVR.17 IC5.17 JP8.1 NRF24.5
SCK1: AVR1.17 IC1.17 JP4.1 NRF1.5
SCK2: AVR2.17 IC2.17 JP15.1 NRF2.5
SCK3: AVR3.17 IC3.17 JP21.1 NRF3.5
SCK4: AVR4.17 IC4.17 JP27.1 NRF4.5
SCK5: AVR5.17 IC6.17 JP33.1 NRF5.5
SCK6: AVR6.17 IC7.17 JP39.1 NRF6.5
SCK7: AVR7.17 IC8.17 JP45.1 NRF7.5
TXO: AVR.31 IC5.31 JP11.4
TXO1: AVR1.31 IC1.31 JP12.4
TXO2: AVR2.31 IC2.31 JP18.4
TXO3: AVR3.31 IC3.31 JP24.4
TXO4: AVR4.31 IC4.31 JP30.4
TXO5: AVR5.31 IC6.31 JP36.4
TXO6: AVR6.31 IC7.31 JP42.4
TXO7: AVR7.31 IC8.31 JP48.4
USB-D+: R7.1 X1.D+
USB-D+1: R15.1 X2.D+
USB-D+2: R23.1 X3.D+
USB-D+3: R31.1 X4.D+
USB-D+4: R39.1 X5.D+
USB-D+5: R47.1 X6.D+
USB-D+6: R55.1 X7.D+
USB-D+7: R63.1 X8.D+
USB-D-: R6.1 R8.1 X1.D-
USB-D-1: R14.1 R16.1 X2.D-
USB-D-2: R22.1 R24.1 X3.D-
USB-D-3: R30.1 R32.1 X4.D-
USB-D-4: R38.1 R40.1 X5.D-
USB-D-5: R46.1 R48.1 X6.D-
USB-D-6: R54.1 R56.1 X7.D-
USB-D-7: R62.1 R64.1 X8.D-
VBAT [vcc]: C19.A JP3.1 LDO.3 U2.3
VBAT1 [vcc]: C8.A JP1.1 LDO1.3 U1.3
VBAT2 [vcc]: C16.A JP13.1 LDO2.3 U3.3
VBAT3 [vcc]: C23.A JP19.1 LDO3.3 U4.3
VBAT4 [vcc]: C29.A JP25.1 LDO4.3 U5.3
VBAT5 [vcc]: C35.A JP31.1 LDO5.3 U6.3
VBAT6 [vcc]: C41.A JP37.1 LDO6.3 U7.3
VBAT7 [vcc]: C47.A JP43.1 LDO7.3 U8.3
VIBR: JP11.2 Q2.3
VIBR1: JP12.2 Q4.3
VIBR2: JP18.2 Q6.3
VIBR3: JP24.2 Q8.3
VIBR4: JP30.2 Q10.3
VIBR5: JP36.2 Q12.3
VIBR6: JP42.2 Q14.3
VIBR7: JP48.2 Q16.3

## Tracks (layer width: path | path; a pad name or v marks a point on that pad's centre or on a via)
3V1  (via drill 0.51 pad 1.02)  (2 unrouted)
  Top 0.203: AVR1.18 31.4,31.64 30.34,31.64 IC1.18 | AVR1.4 24.33,27.75 IC1.4 | AVR1.6 25.78,27.15 25.78,27.79 IC1.6
  Top 0.254: 24.13,27.71 24.11,27.72 AVR1.4 | 16.26,36.34 v16.26,36.6 | R16.2 2.54,31.68 v2.54,30.63 | AVR1.6 24.56,25.93 24.38,25.93 23.37,26.94 22.61,27.71 19.56,27.71 18.03,26.18 v18.03,26.05 | 13.72,27.33 v13.72,27.2 v10.67,27.2 | C6.2 33.4,35.95 33.27,35.82 33.27,34.18 33.78,33.67 v33.78,32.66 32.42,32.66 AVR1.18 | R9.2 17.78,31.77 17.4,32.15 17.4,32.41
  Top 0.406: LDO1.2 15.94,36.28 v16.26,36.6 | 23.37,26.94 24.11,27.69 AVR1.4
  Top 0.508: C5.A 13.72,28.98 | 13.72,28.98 13.72,29.99 14.22,30.5 14.22,31.52 14.73,32.02 17.02,32.02 17.4,32.41 17.53,32.53 17.53,36.34 17.27,36.6 v16.26,36.6 | 13.72,27.33 13.72,28.98 | R9.2 18.54,31.94
  Bottom 0.254: MPU1.2 7.11,37.61 8.64,36.09 15.75,36.09 v16.26,36.6 | v10.67,27.2 9.14,25.67 6.6,25.67 5.84,26.44 5.84,26.69 3.56,28.98 3.56,29.48 v2.54,30.63 | v13.72,27.2 13.72,27.45 14.22,27.96 16.13,27.96 v18.03,26.05 | 32,35.07 33.02,35.07 33.78,34.31 v33.78,32.66
  Bottom 0.406: NRF1.2 34.8,26.18 31.24,29.74 31.24,30.25 | v19.81,37.74 20.07,37.48 21.46,37.48 21.72,37.23 24.26,37.23 31.24,30.25 | 32,35.07 31.24,34.31 31.24,30.25
  Bottom 0.508: v16.26,36.6 17.4,37.74 v19.81,37.74
3V2  (via drill 0.51 pad 1.02)  (2 unrouted)
  Top 0.203: AVR2.18 31.4,52.64 30.34,52.64 IC2.18 | AVR2.4 24.33,48.75 IC2.4 | AVR2.6 25.78,48.15 25.78,48.79 IC2.6
  Top 0.254: 24.13,48.71 24.11,48.72 AVR2.4 | 16.26,57.34 v16.26,57.6 | R24.2 2.54,52.68 v2.54,51.63 | AVR2.6 24.56,46.93 24.38,46.93 23.37,47.94 22.61,48.71 19.56,48.71 18.03,47.18 v18.03,47.05 | 13.72,48.33 v13.72,48.2 v10.67,48.2 | C14.2 33.4,56.95 33.27,56.82 33.27,55.18 33.78,54.67 v33.78,53.66 32.42,53.66 AVR2.18 | R17.2 17.78,52.77 17.4,53.15 17.4,53.41
  Top 0.406: LDO2.2 15.94,57.28 v16.26,57.6 | 23.37,47.94 24.11,48.69 AVR2.4
  Top 0.508: C12.A 13.72,49.98 | 13.72,49.98 13.72,50.99 14.22,51.5 14.22,52.52 14.73,53.02 17.02,53.02 17.4,53.41 17.53,53.53 17.53,57.34 17.27,57.6 v16.26,57.6 | 13.72,48.33 13.72,49.98 | R17.2 18.54,52.94
  Bottom 0.254: MPU2.2 7.11,58.61 8.64,57.09 15.75,57.09 v16.26,57.6 | v10.67,48.2 9.14,46.67 6.6,46.67 5.84,47.44 5.84,47.69 3.56,49.98 3.56,50.48 v2.54,51.63 | v13.72,48.2 13.72,48.45 14.22,48.96 16.13,48.96 v18.03,47.05 | 32,56.07 33.02,56.07 33.78,55.31 v33.78,53.66
  Bottom 0.406: NRF2.2 34.8,47.18 31.24,50.74 31.24,51.25 | v19.81,58.74 20.07,58.48 21.46,58.48 21.72,58.23 24.26,58.23 31.24,51.25 | 32,56.07 31.24,55.31 31.24,51.25
  Bottom 0.508: v16.26,57.6 17.4,58.74 v19.81,58.74
3V3  (via drill 0.51 pad 1.02)  (2 unrouted)
  Top 0.203: AVR.18 31.4,10.64 30.34,10.64 IC5.18 | AVR.4 24.33,6.75 IC5.4 | AVR.6 25.78,6.15 25.78,6.79 IC5.6
  Top 0.254: 24.13,6.71 24.11,6.72 AVR.4 | 16.26,15.34 v16.26,15.6 | R8.2 2.54,10.68 v2.54,9.63 | AVR.6 24.56,4.93 24.38,4.93 23.37,5.94 22.61,6.71 19.56,6.71 18.03,5.18 v18.03,5.05 | 13.72,6.33 v13.72,6.2 v10.67,6.2 | C3.2 33.4,14.95 33.27,14.82 33.27,13.18 33.78,12.68 v33.78,11.66 32.42,11.66 AVR.18 | R2.2 17.78,10.77 17.4,11.15 17.4,11.4
  Top 0.406: LDO.2 15.94,15.28 v16.26,15.6 | 23.37,5.94 24.11,6.69 AVR.4
  Top 0.508: C13.A 13.72,7.98 | 13.72,7.98 13.72,8.99 14.22,9.5 14.22,10.52 14.73,11.02 17.02,11.02 17.4,11.4 17.53,11.53 17.53,15.34 17.27,15.6 v16.26,15.6 | 13.72,6.33 13.72,7.98 | R2.2 18.54,10.94
  Bottom 0.254: MPU6050.2 7.11,16.61 8.64,15.09 15.75,15.09 v16.26,15.6 | v10.67,6.2 9.14,4.67 6.6,4.67 5.84,5.44 5.84,5.69 3.56,7.98 3.56,8.48 v2.54,9.63 | v13.72,6.2 13.72,6.45 14.22,6.96 16.13,6.96 v18.03,5.05 | 32,14.07 33.02,14.07 33.78,13.31 v33.78,11.66
  Bottom 0.406: NRF24.2 34.8,5.18 31.24,8.74 31.24,9.25 | v19.81,16.74 20.07,16.48 21.46,16.48 21.72,16.23 24.26,16.23 31.24,9.25 | 32,14.07 31.24,13.31 31.24,9.25
  Bottom 0.508: v16.26,15.6 17.4,16.74 v19.81,16.74
3V4  (via drill 0.51 pad 1.02)  (2 unrouted)
  Top 0.203: AVR3.18 31.4,73.64 30.34,73.64 IC3.18 | AVR3.4 24.33,69.75 IC3.4 | AVR3.6 25.78,69.15 25.78,69.79 IC3.6
  Top 0.254: 24.13,69.71 24.11,69.72 AVR3.4 | 16.26,78.34 v16.26,78.6 | R32.2 2.54,73.68 v2.54,72.63 | AVR3.6 24.56,67.93 24.38,67.93 23.37,68.94 22.61,69.71 19.56,69.71 18.03,68.18 v18.03,68.06 | 13.72,69.33 v13.72,69.2 v10.67,69.2 | C21.2 33.4,77.95 33.27,77.82 33.27,76.18 33.78,75.67 v33.78,74.66 32.42,74.66 AVR3.18 | R25.2 17.78,73.77 17.4,74.15 17.4,74.41
  Top 0.406: LDO3.2 15.94,78.28 v16.26,78.6 | 23.37,68.94 24.11,69.69 AVR3.4
  Top 0.508: C20.A 13.72,70.98 | 13.72,70.98 13.72,71.99 14.22,72.5 14.22,73.52 14.73,74.02 17.02,74.02 17.4,74.41 17.53,74.53 17.53,78.34 17.27,78.6 v16.26,78.6 | 13.72,69.33 13.72,70.98 | R25.2 18.54,73.94
  Bottom 0.254: MPU3.2 7.11,79.61 8.64,78.09 15.75,78.09 v16.26,78.6 | v10.67,69.2 9.14,67.67 6.6,67.67 5.84,68.44 5.84,68.69 3.56,70.98 3.56,71.48 v2.54,72.63 | v13.72,69.2 13.72,69.45 14.22,69.96 16.13,69.96 v18.03,68.06 | 32,77.07 33.02,77.07 33.78,76.31 v33.78,74.66
  Bottom 0.406: NRF3.2 34.8,68.18 31.24,71.74 31.24,72.25 | v19.81,79.74 20.07,79.48 21.46,79.48 21.72,79.23 24.26,79.23 31.24,72.25 | 32,77.07 31.24,76.31 31.24,72.25
  Bottom 0.508: v16.26,78.6 17.4,79.74 v19.81,79.74
3V5  (via drill 0.51 pad 1.02)  (2 unrouted)
  Top 0.203: AVR4.18 75.4,10.64 74.34,10.64 IC4.18 | AVR4.4 68.33,6.75 IC4.4 | AVR4.6 69.78,6.15 69.78,6.79 IC4.6
  Top 0.254: 68.13,6.71 68.11,6.72 AVR4.4 | 60.26,15.34 v60.26,15.6 | R40.2 46.54,10.68 v46.54,9.63 | AVR4.6 68.56,4.93 68.38,4.93 67.37,5.94 66.61,6.71 63.56,6.71 62.03,5.18 v62.03,5.05 | 57.72,6.33 v57.72,6.2 v54.67,6.2 | C27.2 77.4,14.95 77.27,14.82 77.27,13.18 77.78,12.68 v77.78,11.66 76.42,11.66 AVR4.18 | R33.2 61.78,10.77 61.4,11.15 61.4,11.4
  Top 0.406: LDO4.2 59.94,15.28 v60.26,15.6 | 67.37,5.94 68.11,6.69 AVR4.4
  Top 0.508: C26.A 57.72,7.98 | 57.72,7.98 57.72,8.99 58.22,9.5 58.22,10.52 58.73,11.02 61.02,11.02 61.4,11.4 61.53,11.53 61.53,15.34 61.27,15.6 v60.26,15.6 | 57.72,6.33 57.72,7.98 | R33.2 62.54,10.94
  Bottom 0.254: MPU4.2 51.11,16.61 52.64,15.09 59.75,15.09 v60.26,15.6 | v54.67,6.2 53.14,4.67 50.6,4.67 49.84,5.44 49.84,5.69 47.56,7.98 47.56,8.48 v46.54,9.63 | v57.72,6.2 57.72,6.45 58.22,6.96 60.13,6.96 v62.03,5.05 | 76,14.07 77.02,14.07 77.78,13.31 v77.78,11.66
  Bottom 0.406: NRF4.2 78.8,5.18 75.24,8.74 75.24,9.25 | v63.81,16.74 64.07,16.48 65.46,16.48 65.72,16.23 68.26,16.23 75.24,9.25 | 76,14.07 75.24,13.31 75.24,9.25
  Bottom 0.508: v60.26,15.6 61.4,16.74 v63.81,16.74
3V6  (via drill 0.51 pad 1.02)  (2 unrouted)
  Top 0.203: AVR5.18 75.4,31.64 74.34,31.64 IC6.18 | AVR5.4 68.33,27.75 IC6.4 | AVR5.6 69.78,27.15 69.78,27.79 IC6.6
  Top 0.254: 68.13,27.71 68.11,27.72 AVR5.4 | 60.26,36.34 v60.26,36.6 | R48.2 46.54,31.68 v46.54,30.63 | AVR5.6 68.56,25.93 68.38,25.93 67.37,26.94 66.61,27.71 63.56,27.71 62.03,26.18 v62.03,26.05 | 57.72,27.33 v57.72,27.2 v54.67,27.2 | C33.2 77.4,35.95 77.27,35.82 77.27,34.18 77.78,33.67 v77.78,32.66 76.42,32.66 AVR5.18 | R41.2 61.78,31.77 61.4,32.15 61.4,32.41
  Top 0.406: LDO5.2 59.94,36.28 v60.26,36.6 | 67.37,26.94 68.11,27.69 AVR5.4
  Top 0.508: C32.A 57.72,28.98 | 57.72,28.98 57.72,29.99 58.22,30.5 58.22,31.52 58.73,32.02 61.02,32.02 61.4,32.41 61.53,32.53 61.53,36.34 61.27,36.6 v60.26,36.6 | 57.72,27.33 57.72,28.98 | R41.2 62.54,31.94
  Bottom 0.254: MPU5.2 51.11,37.61 52.64,36.09 59.75,36.09 v60.26,36.6 | v54.67,27.2 53.14,25.67 50.6,25.67 49.84,26.44 49.84,26.69 47.56,28.98 47.56,29.48 v46.54,30.63 | v57.72,27.2 57.72,27.45 58.22,27.96 60.13,27.96 v62.03,26.05 | 76,35.07 77.02,35.07 77.78,34.31 v77.78,32.66
  Bottom 0.406: NRF5.2 78.8,26.18 75.24,29.74 75.24,30.25 | v63.81,37.74 64.07,37.48 65.46,37.48 65.72,37.23 68.26,37.23 75.24,30.25 | 76,35.07 75.24,34.31 75.24,30.25
  Bottom 0.508: v60.26,36.6 61.4,37.74 v63.81,37.74
3V7  (via drill 0.51 pad 1.02)  (2 unrouted)
  Top 0.203: AVR6.18 75.4,52.64 74.34,52.64 IC7.18 | AVR6.4 68.33,48.75 IC7.4 | AVR6.6 69.78,48.15 69.78,48.79 IC7.6
  Top 0.254: 68.13,48.71 68.11,48.72 AVR6.4 | 60.26,57.34 v60.26,57.6 | R56.2 46.54,52.68 v46.54,51.63 | AVR6.6 68.56,46.93 68.38,46.93 67.37,47.94 66.61,48.71 63.56,48.71 62.03,47.18 v62.03,47.05 | 57.72,48.33 v57.72,48.2 v54.67,48.2 | C39.2 77.4,56.95 77.27,56.82 77.27,55.18 77.78,54.67 v77.78,53.66 76.42,53.66 AVR6.18 | R49.2 61.78,52.77 61.4,53.15 61.4,53.41
  Top 0.406: LDO6.2 59.94,57.28 v60.26,57.6 | 67.37,47.94 68.11,48.69 AVR6.4
  Top 0.508: C38.A 57.72,49.98 | 57.72,49.98 57.72,50.99 58.22,51.5 58.22,52.52 58.73,53.02 61.02,53.02 61.4,53.41 61.53,53.53 61.53,57.34 61.27,57.6 v60.26,57.6 | 57.72,48.33 57.72,49.98 | R49.2 62.54,52.94
  Bottom 0.254: MPU6.2 51.11,58.61 52.64,57.09 59.75,57.09 v60.26,57.6 | v54.67,48.2 53.14,46.67 50.6,46.67 49.84,47.44 49.84,47.69 47.56,49.98 47.56,50.48 v46.54,51.63 | v57.72,48.2 57.72,48.45 58.22,48.96 60.13,48.96 v62.03,47.05 | 76,56.07 77.02,56.07 77.78,55.31 v77.78,53.66
  Bottom 0.406: NRF6.2 78.8,47.18 75.24,50.74 75.24,51.25 | v63.81,58.74 64.07,58.48 65.46,58.48 65.72,58.23 68.26,58.23 75.24,51.25 | 76,56.07 75.24,55.31 75.24,51.25
  Bottom 0.508: v60.26,57.6 61.4,58.74 v63.81,58.74
3V8  (via drill 0.51 pad 1.02)  (2 unrouted)
  Top 0.203: AVR7.18 75.4,73.64 74.34,73.64 IC8.18 | AVR7.4 68.33,69.75 IC8.4 | AVR7.6 69.78,69.15 69.78,69.79 IC8.6
  Top 0.254: 68.13,69.71 68.11,69.72 AVR7.4 | 60.26,78.34 v60.26,78.6 | R64.2 46.54,73.68 v46.54,72.63 | AVR7.6 68.56,67.93 68.38,67.93 67.37,68.94 66.61,69.71 63.56,69.71 62.03,68.18 v62.03,68.06 | 57.72,69.33 v57.72,69.2 v54.67,69.2 | C45.2 77.4,77.95 77.27,77.82 77.27,76.18 77.78,75.67 v77.78,74.66 76.42,74.66 AVR7.18 | R57.2 61.78,73.77 61.4,74.15 61.4,74.41
  Top 0.406: LDO7.2 59.94,78.28 v60.26,78.6 | 67.37,68.94 68.11,69.69 AVR7.4
  Top 0.508: C44.A 57.72,70.98 | 57.72,70.98 57.72,71.99 58.22,72.5 58.22,73.52 58.73,74.02 61.02,74.02 61.4,74.41 61.53,74.53 61.53,78.34 61.27,78.6 v60.26,78.6 | 57.72,69.33 57.72,70.98 | R57.2 62.54,73.94
  Bottom 0.254: MPU7.2 51.11,79.61 52.64,78.09 59.75,78.09 v60.26,78.6 | v54.67,69.2 53.14,67.67 50.6,67.67 49.84,68.44 49.84,68.69 47.56,70.98 47.56,71.48 v46.54,72.63 | v57.72,69.2 57.72,69.45 58.22,69.96 60.13,69.96 v62.03,68.06 | 76,77.07 77.02,77.07 77.78,76.31 v77.78,74.66
  Bottom 0.406: NRF7.2 78.8,68.18 75.24,71.74 75.24,72.25 | v63.81,79.74 64.07,79.48 65.46,79.48 65.72,79.23 68.26,79.23 75.24,72.25 | 76,77.07 75.24,76.31 75.24,72.25
  Bottom 0.508: v60.26,78.6 61.4,79.74 v63.81,79.74
A0
  Top 0.203: AVR.23 28.57,13.47 28.57,12.41 IC5.23
  Top 0.254: AVR.23 29.72,14.61 29.72,15.09 28.96,15.85 28.96,16.36 29.21,16.61 29.97,16.61 JP5.4
A1
  Top 0.203: AVR.24 27.86,13.88 IC5.24
  Top 0.254: AVR.24 27.43,15.57 JP5.3
A2
  Top 0.203: AVR.25 27.01,13.88 IC5.25
  Top 0.254: AVR.25 24.89,16 JP5.2
A3
  Top 0.203: AVR.26 26.29,13.47 26.29,12.41 IC5.26
  Top 0.254: AVR.26 25.15,14.61 25.15,14.71 22.73,17.12 22.73,17.24 arc45 22.64,17.47 JP5.1
A4  (via drill 0.51 pad 1.02)
  Top 0.203: AVR.27 25.91,12.72 25.91,12.09 IC5.27
  Top 0.254: AVR.27 23.54,15.09 v23.37,15.09
  Bottom 0.254: v23.37,15.09 22.35,15.09 21.59,14.33 20.57,14.33 19.81,15.09 18.03,15.09 17.02,14.07 7.71,14.07 6.97,14.81 5.86,14.81 5.25,15.41 3.62,15.41 MPU6050.4
A5  (via drill 0.51 pad 1.02)
  Top 0.203: AVR.28 24.68,12.61 IC5.28
  Top 0.254: AVR.28 23.43,14.07 22.86,14.07 21.59,15.34 v20.83,15.34
  Bottom 0.254: v20.83,15.34 20.57,15.6 17.78,15.6 16.76,14.58 8.12,14.58 7.2,15.49 6.07,15.49 MPU6050.3
A6  (via drill 0.51 pad 1.02)
  Top 0.203: AVR.19 30.65,11.02 30.02,11.02 IC5.19 | R4.1 34.38,4.08 34.8,3.66 v37.59,3.66
  Top 0.254: AVR.19 32.26,12.63 v32.26,12.68 32.52,12.94 D1.C
  Bottom 0.203: v37.59,3.66 37.59,5.94 37.08,6.45 35.31,6.45
  Bottom 0.254: 35.31,6.45 34.54,6.45 32,8.99 32,12.42 v32.26,12.68
A7
  Top 0.203: AVR.22 28.96,12.72 28.96,12.09 IC5.22
A8  (via drill 0.51 pad 1.02)
  Top 0.203: AVR1.28 24.68,33.61 IC1.28
  Top 0.254: AVR1.28 23.43,35.07 22.86,35.07 21.59,36.34 v20.83,36.34
  Bottom 0.254: v20.83,36.34 20.57,36.6 17.78,36.6 16.76,35.58 8.12,35.58 7.2,36.49 6.07,36.49 MPU1.3
A9  (via drill 0.51 pad 1.02)
  Top 0.203: AVR1.27 25.91,33.72 25.91,33.09 IC1.27
  Top 0.254: AVR1.27 23.54,36.09 v23.37,36.09
  Bottom 0.254: v23.37,36.09 22.35,36.09 21.59,35.33 20.57,35.33 19.81,36.09 18.03,36.09 17.02,35.07 7.71,35.07 6.97,35.81 5.86,35.81 5.25,36.41 3.62,36.41 MPU1.4
A10
  Top 0.203: AVR1.26 26.29,34.47 26.29,33.41 IC1.26
  Top 0.254: AVR1.26 25.15,35.61 25.15,35.71 22.73,38.12 22.73,38.24 arc45 22.64,38.47 JP2.1
A11
  Top 0.203: AVR1.25 27.01,34.88 IC1.25
  Top 0.254: AVR1.25 24.89,37 JP2.2
A12
  Top 0.203: AVR1.24 27.86,34.88 IC1.24
  Top 0.254: AVR1.24 27.43,36.57 JP2.3
A13
  Top 0.203: AVR1.23 28.57,34.47 28.57,33.41 IC1.23
  Top 0.254: AVR1.23 29.72,35.61 29.72,36.09 28.96,36.85 28.96,37.36 29.21,37.61 29.97,37.61 JP2.4
A14  (via drill 0.51 pad 1.02)
  Top 0.203: AVR1.19 30.65,32.02 30.02,32.02 IC1.19 | R12.1 34.38,25.08 34.8,24.66 v37.59,24.66
  Top 0.254: AVR1.19 32.26,33.63 v32.26,33.67 32.52,33.94 D2.C
  Bottom 0.203: v37.59,24.66 37.59,26.94 37.08,27.45 35.31,27.45
  Bottom 0.254: 35.31,27.45 34.54,27.45 32,29.99 32,33.42 v32.26,33.67
A15
  Top 0.203: AVR1.22 28.96,33.72 28.96,33.09 IC1.22
A16  (via drill 0.51 pad 1.02)
  Top 0.203: AVR2.28 24.68,54.61 IC2.28
  Top 0.254: AVR2.28 23.43,56.07 22.86,56.07 21.59,57.34 v20.83,57.34
  Bottom 0.254: v20.83,57.34 20.57,57.6 17.78,57.6 16.76,56.58 8.12,56.58 7.2,57.49 6.07,57.49 MPU2.3
A17  (via drill 0.51 pad 1.02)
  Top 0.203: AVR2.27 25.91,54.72 25.91,54.09 IC2.27
  Top 0.254: AVR2.27 23.54,57.09 v23.37,57.09
  Bottom 0.254: v23.37,57.09 22.35,57.09 21.59,56.33 20.57,56.33 19.81,57.09 18.03,57.09 17.02,56.07 7.71,56.07 6.97,56.81 5.86,56.81 5.25,57.41 3.62,57.41 MPU2.4
A18
  Top 0.203: AVR2.26 26.29,55.47 26.29,54.41 IC2.26
  Top 0.254: AVR2.26 25.15,56.61 25.15,56.71 22.73,59.12 22.73,59.24 arc45 22.64,59.47 JP14.1
A19
  Top 0.203: AVR2.25 27.01,55.88 IC2.25
  Top 0.254: AVR2.25 24.89,58 JP14.2
A20
  Top 0.203: AVR2.24 27.86,55.88 IC2.24
  Top 0.254: AVR2.24 27.43,57.57 JP14.3
A21
  Top 0.203: AVR2.23 28.57,55.47 28.57,54.41 IC2.23
  Top 0.254: AVR2.23 29.72,56.61 29.72,57.09 28.96,57.85 28.96,58.36 29.21,58.61 29.97,58.61 JP14.4
A22  (via drill 0.51 pad 1.02)
  Top 0.203: AVR2.19 30.65,53.02 30.02,53.02 IC2.19 | R20.1 34.38,46.08 34.8,45.66 v37.59,45.66
  Top 0.254: AVR2.19 32.26,54.63 v32.26,54.67 32.52,54.94 D3.C
  Bottom 0.203: v37.59,45.66 37.59,47.94 37.08,48.45 35.31,48.45
  Bottom 0.254: 35.31,48.45 34.54,48.45 32,50.99 32,54.42 v32.26,54.67
A23
  Top 0.203: AVR2.22 28.96,54.72 28.96,54.09 IC2.22
A24  (via drill 0.51 pad 1.02)
  Top 0.203: AVR3.28 24.68,75.61 IC3.28
  Top 0.254: AVR3.28 23.43,77.07 22.86,77.07 21.59,78.34 v20.83,78.34
  Bottom 0.254: v20.83,78.34 20.57,78.6 17.78,78.6 16.76,77.58 8.12,77.58 7.2,78.49 6.07,78.49 MPU3.3
A25  (via drill 0.51 pad 1.02)
  Top 0.203: AVR3.27 25.91,75.72 25.91,75.08 IC3.27
  Top 0.254: AVR3.27 23.54,78.09 v23.37,78.09
  Bottom 0.254: v23.37,78.09 22.35,78.09 21.59,77.33 20.57,77.33 19.81,78.09 18.03,78.09 17.02,77.07 7.71,77.07 6.97,77.81 5.86,77.81 5.25,78.41 3.62,78.41 MPU3.4
A26
  Top 0.203: AVR3.26 26.29,76.47 26.29,75.41 IC3.26
  Top 0.254: AVR3.26 25.15,77.61 25.15,77.71 22.73,80.12 22.73,80.24 arc45 22.64,80.47 JP20.1
A27
  Top 0.203: AVR3.25 27.01,76.88 IC3.25
  Top 0.254: AVR3.25 24.89,79 JP20.2
A28
  Top 0.203: AVR3.24 27.86,76.88 IC3.24
  Top 0.254: AVR3.24 27.43,78.57 JP20.3
A29
  Top 0.203: AVR3.23 28.57,76.47 28.57,75.41 IC3.23
  Top 0.254: AVR3.23 29.72,77.61 29.72,78.09 28.96,78.85 28.96,79.36 29.21,79.61 29.97,79.61 JP20.4
A30  (via drill 0.51 pad 1.02)
  Top 0.203: AVR3.19 30.65,74.02 30.02,74.02 IC3.19 | R28.1 34.38,67.08 34.8,66.66 v37.59,66.66
  Top 0.254: AVR3.19 32.26,75.63 v32.26,75.67 32.52,75.94 D4.C
  Bottom 0.203: v37.59,66.66 37.59,68.94 37.08,69.45 35.31,69.45
  Bottom 0.254: 35.31,69.45 34.54,69.45 32,71.99 32,75.42 v32.26,75.67
A31
  Top 0.203: AVR3.22 28.96,75.72 28.96,75.08 IC3.22
A32  (via drill 0.51 pad 1.02)
  Top 0.203: AVR4.28 68.68,12.61 IC4.28
  Top 0.254: AVR4.28 67.43,14.07 66.86,14.07 65.59,15.34 v64.83,15.34
  Bottom 0.254: v64.83,15.34 64.57,15.6 61.78,15.6 60.76,14.58 52.12,14.58 51.2,15.49 50.07,15.49 MPU4.3
A33  (via drill 0.51 pad 1.02)
  Top 0.203: AVR4.27 69.91,12.72 69.91,12.09 IC4.27
  Top 0.254: AVR4.27 67.54,15.09 v67.37,15.09
  Bottom 0.254: v67.37,15.09 66.35,15.09 65.59,14.33 64.57,14.33 63.81,15.09 62.03,15.09 61.02,14.07 51.71,14.07 50.97,14.81 49.86,14.81 49.25,15.41 47.62,15.41 MPU4.4
A34
  Top 0.203: AVR4.26 70.29,13.47 70.29,12.41 IC4.26
  Top 0.254: AVR4.26 69.15,14.61 69.15,14.71 66.73,17.12 66.73,17.24 arc45 66.64,17.47 JP26.1
A35
  Top 0.203: AVR4.25 71.01,13.88 IC4.25
  Top 0.254: AVR4.25 68.89,16 JP26.2
A36
  Top 0.203: AVR4.24 71.86,13.88 IC4.24
  Top 0.254: AVR4.24 71.43,15.57 JP26.3
A37
  Top 0.203: AVR4.23 72.58,13.47 72.58,12.41 IC4.23
  Top 0.254: AVR4.23 73.72,14.61 73.72,15.09 72.96,15.85 72.96,16.36 73.21,16.61 73.97,16.61 JP26.4
A38  (via drill 0.51 pad 1.02)
  Top 0.203: AVR4.19 74.65,11.02 74.02,11.02 IC4.19 | R36.1 78.38,4.08 78.8,3.66 v81.59,3.66
  Top 0.254: AVR4.19 76.26,12.63 v76.26,12.68 76.52,12.94 D5.C
  Bottom 0.203: v81.59,3.66 81.59,5.94 81.08,6.45 79.31,6.45
  Bottom 0.254: 79.31,6.45 78.54,6.45 76,8.99 76,12.42 v76.26,12.68
A39
  Top 0.203: AVR4.22 72.96,12.72 72.96,12.09 IC4.22
A40  (via drill 0.51 pad 1.02)
  Top 0.203: AVR5.28 68.68,33.61 IC6.28
  Top 0.254: AVR5.28 67.43,35.07 66.86,35.07 65.59,36.34 v64.83,36.34
  Bottom 0.254: v64.83,36.34 64.57,36.6 61.78,36.6 60.76,35.58 52.12,35.58 51.2,36.49 50.07,36.49 MPU5.3
A41  (via drill 0.51 pad 1.02)
  Top 0.203: AVR5.27 69.91,33.72 69.91,33.09 IC6.27
  Top 0.254: AVR5.27 67.54,36.09 v67.37,36.09
  Bottom 0.254: v67.37,36.09 66.35,36.09 65.59,35.33 64.57,35.33 63.81,36.09 62.03,36.09 61.02,35.07 51.71,35.07 50.97,35.81 49.86,35.81 49.25,36.41 47.62,36.41 MPU5.4
A42
  Top 0.203: AVR5.26 70.29,34.47 70.29,33.41 IC6.26
  Top 0.254: AVR5.26 69.15,35.61 69.15,35.71 66.73,38.12 66.73,38.24 arc45 66.64,38.47 JP32.1
A43
  Top 0.203: AVR5.25 71.01,34.88 IC6.25
  Top 0.254: AVR5.25 68.89,37 JP32.2
A44
  Top 0.203: AVR5.24 71.86,34.88 IC6.24
  Top 0.254: AVR5.24 71.43,36.57 JP32.3
A45
  Top 0.203: AVR5.23 72.58,34.47 72.58,33.41 IC6.23
  Top 0.254: AVR5.23 73.72,35.61 73.72,36.09 72.96,36.85 72.96,37.36 73.21,37.61 73.97,37.61 JP32.4
A46  (via drill 0.51 pad 1.02)
  Top 0.203: AVR5.19 74.65,32.02 74.02,32.02 IC6.19 | R44.1 78.38,25.08 78.8,24.66 v81.59,24.66
  Top 0.254: AVR5.19 76.26,33.63 v76.26,33.67 76.52,33.94 D6.C
  Bottom 0.203: v81.59,24.66 81.59,26.94 81.08,27.45 79.31,27.45
  Bottom 0.254: 79.31,27.45 78.54,27.45 76,29.99 76,33.42 v76.26,33.67
A47
  Top 0.203: AVR5.22 72.96,33.72 72.96,33.09 IC6.22
A48  (via drill 0.51 pad 1.02)
  Top 0.203: AVR6.28 68.68,54.61 IC7.28
  Top 0.254: AVR6.28 67.43,56.07 66.86,56.07 65.59,57.34 v64.83,57.34
  Bottom 0.254: v64.83,57.34 64.57,57.6 61.78,57.6 60.76,56.58 52.12,56.58 51.2,57.49 50.07,57.49 MPU6.3
A49  (via drill 0.51 pad 1.02)
  Top 0.203: AVR6.27 69.91,54.72 69.91,54.09 IC7.27
  Top 0.254: AVR6.27 67.54,57.09 v67.37,57.09
  Bottom 0.254: v67.37,57.09 66.35,57.09 65.59,56.33 64.57,56.33 63.81,57.09 62.03,57.09 61.02,56.07 51.71,56.07 50.97,56.81 49.86,56.81 49.25,57.41 47.62,57.41 MPU6.4
A50
  Top 0.203: AVR6.26 70.29,55.47 70.29,54.41 IC7.26
  Top 0.254: AVR6.26 69.15,56.61 69.15,56.71 66.73,59.12 66.73,59.24 arc45 66.64,59.47 JP38.1
A51
  Top 0.203: AVR6.25 71.01,55.88 IC7.25
  Top 0.254: AVR6.25 68.89,58 JP38.2
A52
  Top 0.203: AVR6.24 71.86,55.88 IC7.24
  Top 0.254: AVR6.24 71.43,57.57 JP38.3
A53
  Top 0.203: AVR6.23 72.58,55.47 72.58,54.41 IC7.23
  Top 0.254: AVR6.23 73.72,56.61 73.72,57.09 72.96,57.85 72.96,58.36 73.21,58.61 73.97,58.61 JP38.4
A54  (via drill 0.51 pad 1.02)
  Top 0.203: AVR6.19 74.65,53.02 74.02,53.02 IC7.19 | R52.1 78.38,46.08 78.8,45.66 v81.59,45.66
  Top 0.254: AVR6.19 76.26,54.63 v76.26,54.67 76.52,54.94 D7.C
  Bottom 0.203: v81.59,45.66 81.59,47.94 81.08,48.45 79.31,48.45
  Bottom 0.254: 79.31,48.45 78.54,48.45 76,50.99 76,54.42 v76.26,54.67
A55
  Top 0.203: AVR6.22 72.96,54.72 72.96,54.09 IC7.22
A56  (via drill 0.51 pad 1.02)
  Top 0.203: AVR7.28 68.68,75.61 IC8.28
  Top 0.254: AVR7.28 67.43,77.07 66.86,77.07 65.59,78.34 v64.83,78.34
  Bottom 0.254: v64.83,78.34 64.57,78.6 61.78,78.6 60.76,77.58 52.12,77.58 51.2,78.49 50.07,78.49 MPU7.3
A57  (via drill 0.51 pad 1.02)
  Top 0.203: AVR7.27 69.91,75.72 69.91,75.08 IC8.27
  Top 0.254: AVR7.27 67.54,78.09 v67.37,78.09
  Bottom 0.254: v67.37,78.09 66.35,78.09 65.59,77.33 64.57,77.33 63.81,78.09 62.03,78.09 61.02,77.07 51.71,77.07 50.97,77.81 49.86,77.81 49.25,78.41 47.62,78.41 MPU7.4
A58
  Top 0.203: AVR7.26 70.29,76.47 70.29,75.41 IC8.26
  Top 0.254: AVR7.26 69.15,77.61 69.15,77.71 66.73,80.12 66.73,80.24 arc45 66.64,80.47 JP44.1
A59
  Top 0.203: AVR7.25 71.01,76.88 IC8.25
  Top 0.254: AVR7.25 68.89,79 JP44.2
A60
  Top 0.203: AVR7.24 71.86,76.88 IC8.24
  Top 0.254: AVR7.24 71.43,78.57 JP44.3
A61
  Top 0.203: AVR7.23 72.58,76.47 72.58,75.41 IC8.23
  Top 0.254: AVR7.23 73.72,77.61 73.72,78.09 72.96,78.85 72.96,79.36 73.21,79.61 73.97,79.61 JP44.4
A62  (via drill 0.51 pad 1.02)
  Top 0.203: AVR7.19 74.65,74.02 74.02,74.02 IC8.19 | R60.1 78.38,67.08 78.8,66.66 v81.59,66.66
  Top 0.254: AVR7.19 76.26,75.63 v76.26,75.67 76.52,75.94 D8.C
  Bottom 0.203: v81.59,66.66 81.59,68.94 81.08,69.45 79.31,69.45
  Bottom 0.254: 79.31,69.45 78.54,69.45 76,71.99 76,75.42 v76.26,75.67
A63
  Top 0.203: AVR7.22 72.96,75.72 72.96,75.08 IC8.22
AREF
  Top 0.203: IC5.20 30.54,12.25 AVR.20 31.24,12.74 31.24,14.07 31.62,14.45 31.62,14.83 32,15.21 C1.2
AREF1
  Top 0.203: IC1.20 30.54,33.25 AVR1.20 31.24,33.74 31.24,35.07 31.62,35.45 31.62,35.83 32,36.22 C7.2
AREF2
  Top 0.203: IC2.20 30.54,54.25 AVR2.20 31.24,54.74 31.24,56.07 31.62,56.45 31.62,56.83 32,57.22 C15.2
AREF3
  Top 0.203: IC3.20 30.54,75.25 AVR3.20 31.24,75.74 31.24,77.07 31.62,77.45 31.62,77.83 32,78.22 C22.2
AREF4
  Top 0.203: IC4.20 74.54,12.25 AVR4.20 75.24,12.74 75.24,14.07 75.62,14.45 75.62,14.83 76,15.21 C28.2
AREF5
  Top 0.203: IC6.20 74.54,33.25 AVR5.20 75.24,33.74 75.24,35.07 75.62,35.45 75.62,35.83 76,36.22 C34.2
AREF6
  Top 0.203: IC7.20 74.54,54.25 AVR6.20 75.24,54.74 75.24,56.07 75.62,56.45 75.62,56.83 76,57.22 C40.2
AREF7
  Top 0.203: IC8.20 74.54,75.25 AVR7.20 75.24,75.74 75.24,77.07 75.62,77.45 75.62,77.83 76,78.22 C46.2
BUS